# Altium PCB PCB1.PcbDoc (part 2 of 4)
Units mil, origin at the board's own origin, x right, y up, seen from the top; angles counter-clockwise.
Board outline 1968.5 x 2362.2 mil, 4 copper layers (Top Layer, GND, VCC, Bottom Layer), stack 30.634 mil thick; 134 components, 248 nets, 1063 pads, 710 vias.
Unrouted connection lines stored in the file: 163.
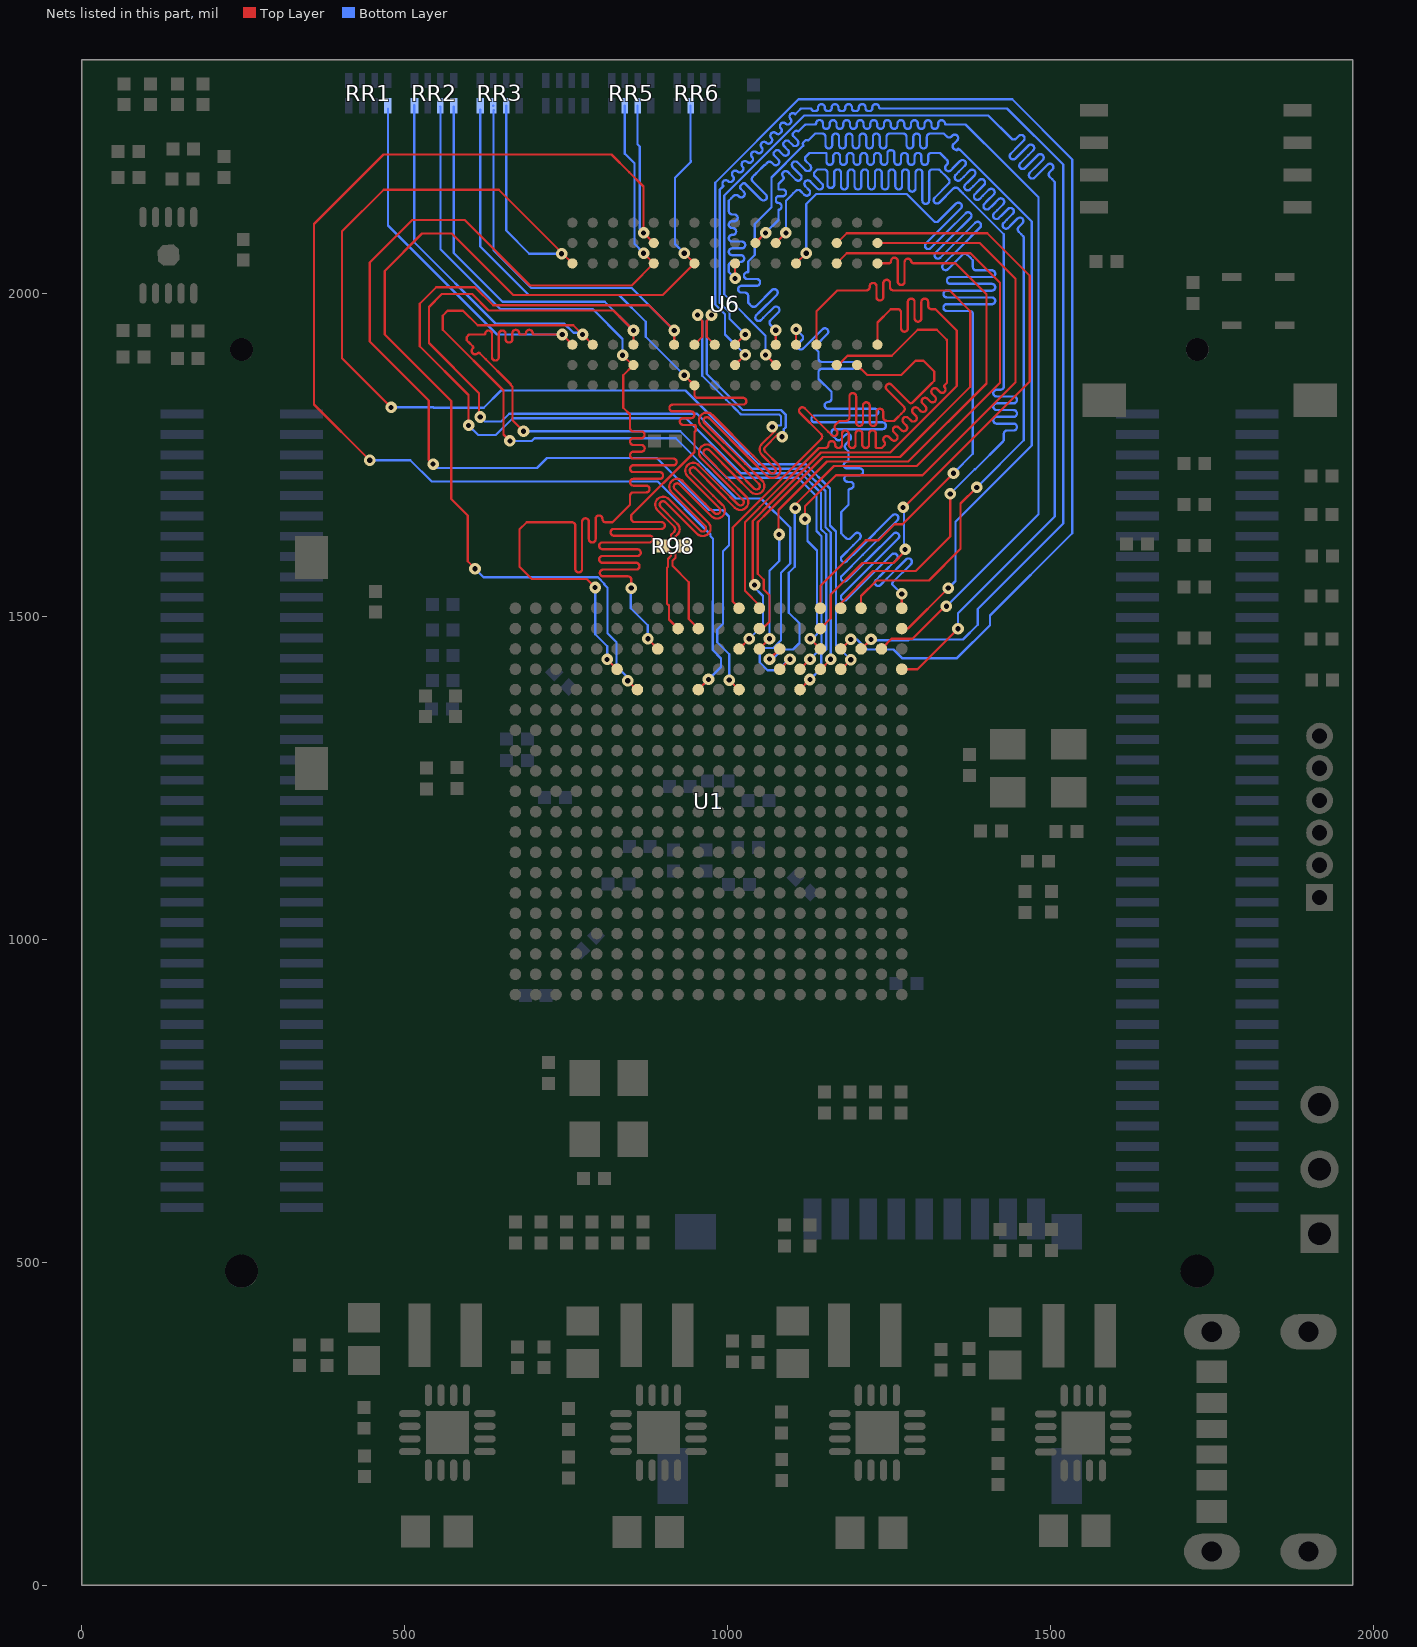
[diagram p4: the nets of this part, all layers, seen from the top]

## Via types
v1: diameter 18, hole 8, Top Layer to Bottom Layer, tented both sides, 708 vias
v2: diameter 40, hole 20, Top Layer to Bottom Layer, tented both sides, 2 vias

## Nets (pads, with @x,y where several pads share a name; then routed paths per layer and width w, separated by ;. In a path a pad name is that pad's centre, name@x,y a point inside that pad or via, vN(x,y) a via of type N, cw(c..) or ccw(c..) an arc to the next point about the centre after c; other vN are vias at no path point) (continued)
ADDR3-A10: RR3.7 U1.F5 U6.L7 | length 2159.5
  Top Layer w3.5: v1(599,1796) 599,1843 523.5,1918.5 523.5,1984.5 549,2010 609,2010 637,1982 878.55,1982 v1(917.45,1943.1) U6.L7@917.45,1920.83 ; U1.F5@1111.85,1386.65 v1(1127.6,1402.4)
  Bottom Layer w3.5: v1(599,1796) 614,1781 641,1781 667.25,1807.25 935.75,1807.25 1021,1722 1114.1,1722 1144.75,1691.35 1144.75,1635.3 1152.75,1627.3 1152.75,1448.85 1145,1441.1 1145,1419.8 v1(1127.6,1402.4) ; v1@599,1796.75 v1@599.38,1796.38 ; RR3.7@637,2291 RR3.7@637.44,2290.56 ; RR3.7@638,2284 637.44,2283.44 637.44,2067.56 696,2009 851.55,2009 v1(917.45,1943.1)
ADDR3-A11: RR2.8 U1.G4 U6.R7 | length 1837.1
  Top Layer w3.5: v1(663,1772) 653,1782 653,1850 559,1944 559,1966 566.5,1973.5 590.5,1973.5 612.99,1951.01 761.28,1951.01 v1(775.53,1936.76) U6.R7@791.28,1921.01 ; U1.G4@1081,1418 v1(1096.75,1433.75)
  Bottom Layer w3.5: RR2.8@515,2292 515,2079.6 640.6,1954 746.94,1954 761.41,1939.53 772.75,1939.53 v1(775.53,1936.76) ; v1(663,1772) 697,1772 701,1776 920,1776 1013,1683 1052,1683 1097,1638 1097,1582 1082.95,1567.95 1082.95,1463.3 1071,1451.35 1056.35,1451.35 1050,1445 1050,1429.05 1062.05,1417 1078,1417 1094.75,1433.75 v1(1096.75,1433.75)
ADDR3-A12: RR2.5 U1.E4 U6.N7 | length 2007.9
  Top Layer w3.5: v1(617,1809) 615,1811 615,1846 537.5,1923.5 537.5,1979.5 557.5,1999.5 604.5,1999.5 630,1974 823.56,1974 v1(854.46,1943.1) U6.N7@854.46,1920.83 ; U1.E4@1144,1418 v1(1159.75,1433.75)
  Bottom Layer w3.5: RR2.5@576,2290 576,2063.15 651.65,1987.5 810.06,1987.5 v1(854.46,1943.1) ; v1(617,1809) 624,1802 649.75,1802 662,1814.25 952.75,1814.25 1038,1729 1117,1729 1151.75,1694.25 1151.75,1638.2 1159.75,1630.2 v1(1159.75,1433.75)
ADDR3-A13: RR3.6 U1.D4 U6.T3 | length 2085.7
  Top Layer w3.5: v1(479,1824) 403,1900 403,2096.6 467.4,2161 645.77,2161 v1@744.77,2062 ; v1(743,2062) v1@744.77,2062 ; U6.T3@759.78,2046.99 v1@744.77,2062 ; U1.D4@1175.05,1417.35 v1(1190.8,1433.1)
  Bottom Layer w3.5: v1(479,1824) 544.25,1824 545,1823.25 622.49,1823.25 649.23,1849.99 849.84,1849.99 850.1,1850.25 891.41,1850.25 891.67,1849.99 935.01,1849.99 1018.75,1766.25 1018.75,1765.51 1048.26,1736 1121,1736 1158.75,1698.25 1158.75,1641.1 1168,1631.85 1168,1455.9 v1(1190.8,1433.1) ; RR3.6@657.13,2291 657.13,2097.87 693,2062 v1(743,2062)
ADDR3-A14: RR1.5 U1.F4 U6.T7 | length 1795
  Top Layer w3.5: 624.75,1937.78 cw(c630,1937.78) 630,1943.03 cw(c630,1937.78) 635.25,1937.78 635.25,1936.76 635.25,1901.8 ccw(c640.5,1901.8) 640.5,1896.55 ccw(c640.5,1901.8) 645.75,1901.8 645.75,1936.76 645.75,1937.78 cw(c651,1937.78) 651,1943.03 cw(c651,1937.78) 656.25,1937.78 656.25,1936.76 656.25,1929.64 ccw(c661.5,1929.64) 661.5,1924.39 ccw(c661.5,1929.64) 666.75,1929.64 666.75,1936.76 666.75,1938.76 cw(c672,1938.76) 672,1944.01 cw(c672,1938.76) 677.25,1938.76 ccw(c679.25,1938.76) 679.25,1936.76 685.75,1936.76 ccw(c685.75,1938.76) 687.75,1938.76 cw(c693,1938.76) 693,1944.01 cw(c693,1938.76) 698.25,1938.76 ccw(c700.25,1938.76) 700.25,1936.76 708.75,1936.76 714,1936.76 v1(744.03,1936.76) U6.T7@759.78,1921.01 ; 624.75,1938.76 cw(c622.75,1938.76) 622.75,1936.76 599.76,1936.76 596,1933 596,1928 599.71,1924.29 605.3,1918.7 cw(c603.46,1916.86) 605.3,1915.02 ccw(c609.01,1911.31) 605.3,1907.6 ccw(c609.01,1911.31) 612.72,1907.6 cw(c614.56,1905.76) 616.4,1907.6 625.5,1898.5 660,1864 664.5,1859.5 ; 664,1859 667,1856 667,1804 v1(684,1787) ; U1.F4@1112,1418 v1(1127.75,1433.75)
  Bottom Layer w3.5: RR1.5@474,2287 474,2105.75 643,1936.76 v1(744.03,1936.76) ; v1(684,1787) 927,1787 999,1715 1109,1715 1137.75,1686.25 1137.75,1632.4 1145.75,1624.4 1145.75,1451.75 v1(1127.75,1433.75)
ADDR3-BA0: RR5.6 U1.L5 U6.M2 | length 2107.5
  Top Layer w3.5: v1(446,1742) 359.5,1828.5 359.5,2107.8 467.2,2215.5 482.3,2215.5 820.5,2215.5 847.74,2188.26 867.54,2168.46 870.01,2165.99 v1(870.01,2094.24) U6.M2@885.76,2078.49 ; U1.L5@954.85,1386.85 v1(970.6,1402.6)
  Bottom Layer w3.5: v1@446,1742.25 508.75,1742.25 542,1709 892,1709 973.75,1627.25 973.75,1624.51 977.7,1620.56 977.7,1524.87 977,1524.17 977,1448 990,1435 990,1421.8 v1@972.2,1404 ; RR5.6@860.73,2291 860.73,2231.27 864,2228 864,2100.25 v1(870.01,2094.24)
ADDR3-BA1: RR2.6 U1.R4 U6.N8 | length 1933.5
  Top Layer w3.5: v1(795,1545) 782,1558 697,1558 678,1577 678,1635 689,1646 759,1646 cw(c759,1640.75) 764.25,1640.75 764.25,1573.57 ccw(c769.5,1573.57) 769.5,1568.32 ccw(c769.5,1573.57) 774.75,1573.57 774.75,1646 774.75,1646.9 cw(c780,1646.9) 780,1652.15 cw(c780,1646.9) 785.25,1646.9 785.25,1646 785.25,1619.93 ccw(c790.5,1619.93) 790.5,1614.68 ccw(c790.5,1619.93) 795.75,1619.93 795.75,1646 795.75,1651.25 cw(c801,1651.25) 801,1656.5 cw(c801,1651.25) 806.25,1651.25 ccw(c811.5,1651.25) 811.5,1646 816.75,1646 822,1646 841,1665 845.29,1669.29 849,1673 849,1681.75 849,1687 cw(c854.25,1687) 854.25,1692.25 873.93,1692.25 ccw(c873.93,1697.5) 879.18,1697.5 ccw(c873.93,1697.5) 873.93,1702.75 854.25,1702.75 cw(c854.25,1708) 849,1708 cw(c854.25,1708) 854.25,1713.25 894.93,1713.25 ccw(c894.93,1718.5) 900.18,1718.5 ccw(c894.93,1718.5) 894.93,1723.75 854.25,1723.75 cw(c854.25,1729) 849,1729 cw(c854.25,1729) 854.25,1734.25 915.93,1734.25 ccw(c915.93,1739.5) 921.18,1739.5 ccw(c915.93,1739.5) 915.93,1744.75 854.25,1744.75 cw(c854.25,1750) 849,1750 cw(c854.25,1750) 854.25,1755.25 866.42,1755.25 ccw(c866.42,1760.5) 871.67,1760.5 ccw(c866.42,1760.5) 866.42,1765.75 854.25,1765.75 cw(c854.25,1771) 849,1771 cw(c854.25,1771) 854.25,1776.25 866.32,1776.25 ccw(c866.32,1781.5) 871.57,1781.5 ccw(c866.32,1781.5) 866.32,1786.75 854.25,1786.75 cw(c854.25,1792) 849,1792 849,1797.25 849,1807.75 849,1813 838.52,1823.48 838.52,1828 838.52,1873.76 U6.N8@854.27,1889.51 ; v1(813.6,1433.6) U1.R4@829.35,1417.85 ; v1(837.52,1904.76) U6.N8@853.27,1889.01
  Bottom Layer w3.5: RR2.6@555,2290 555.33,2289.67 555.33,2068.97 648.3,1976 791.52,1976 837.52,1930 v1(837.52,1904.76) ; v1(795,1545) 795,1472.45 813.6,1453.85 v1(813.6,1433.6)
ADDR3-BA2: RR5.7 U1.J5 U6.M3 | length 1933.9
  Top Layer w3.5: v1(544,1736) 537.25,1742.75 537.25,1834.75 446,1926 446,2048.21 511.79,2114 593,2114 694.13,2012.87 851.64,2012.87 U6.M3@885.76,2046.99 v1(870.01,2062.74) ; v1(1002.6,1401.6) U1.J5@1018.35,1385.85
  Bottom Layer w3.5: v1(544,1736) 550,1730 705,1730 720.5,1745.5 890.24,1745.5 970.87,1664.87 992.23,1664.87 1002.25,1654.85 1002.25,1610.25 993,1601 993,1489 984,1480 984,1460 1002.6,1441.4 v1(1002.6,1401.6) ; RR5.7@841.04,2291 841.04,2216.96 855.76,2202.24 855.76,2077.24 870.01,2062.99 v1(870.01,2062.74)
ADDR3-CAS: RR6.7 U1.P5 U6.K3 | length 1747.7
  Top Layer w3.5: v1(609,1574) 597.5,1585.5 597.5,1656.5 572,1682 572,1834 469,1937 469,2035.21 526.9,2093.1 572.9,2093.1 668,1998 899.76,1998 U6.K3@948.76,2046.99 v1(933.01,2062.74) ; v1(845.6,1400.6) U1.P5@861.35,1384.85
  Bottom Layer w3.5: v1(609,1574) 622.25,1560.75 799.4,1560.75 809.25,1550.91 809.25,1549.49 814,1544.74 814,1474 828,1460 828,1423 845.6,1405.4 v1(845.6,1400.6) ; v1(933.01,2062.74) 918.76,2076.99 918.76,2179.76 943,2204 943,2206 ; 942.84,2204.84 RR6.7@942.84,2291
ADDR3-CKE0: RR3.8 U1.N3 U6.K9 | length 1924.3
  Top Layer w3.5: v1(851,1544) 851,1557 ccw(c845.75,1557) 845.75,1562.25 807.48,1562.25 cw(c807.48,1567.5) 802.23,1567.5 cw(c807.48,1567.5) 807.48,1572.75 851,1572.75 858.46,1572.75 ccw(c858.46,1578) 863.71,1578 ccw(c858.46,1578) 858.46,1583.25 851,1583.25 806.49,1583.25 cw(c806.49,1588.5) 801.24,1588.5 cw(c806.49,1588.5) 806.49,1593.75 851,1593.75 860.39,1593.75 ccw(c860.39,1599) 865.64,1599 ccw(c860.39,1599) 860.39,1604.25 851,1604.25 806.49,1604.25 cw(c806.49,1609.5) 801.24,1609.5 cw(c806.49,1609.5) 806.49,1614.75 851,1614.75 879.25,1614.75 ccw(c879.25,1620) 884.5,1620 ccw(c879.25,1620) 879.25,1625.25 851,1625.25 824.06,1625.25 cw(c824.06,1630.5) 818.81,1630.5 cw(c824.06,1630.5) 824.06,1635.75 851,1635.75 897.72,1635.75 ccw(c897.72,1641) 902.97,1641 ccw(c897.72,1641) 897.72,1646.25 856.25,1646.25 cw(c856.25,1651.5) 851,1651.5 851,1657.24 948.76,1755 948.76,1777 948.76,1786.25 ccw(c948.76,1788.14) 950.64,1788.14 950.64,1794.86 ccw(c948.76,1794.86) 948.76,1796.75 931.39,1796.75 cw(c931.39,1802) 926.14,1802 cw(c931.39,1802) 931.39,1807.25 943.51,1807.25 ccw(c943.51,1812.5) 948.76,1812.5 ccw(c943.51,1812.5) 943.51,1817.75 915.32,1817.75 cw(c915.32,1823) 910.07,1823 cw(c915.32,1823) 915.32,1828.25 948.76,1828.25 1023.87,1828.25 ccw(c1023.87,1833.5) 1029.12,1833.5 ccw(c1023.87,1833.5) 1023.87,1838.75 954.01,1838.75 cw(c954.01,1844) 948.76,1844 U6.K9@948.76,1858.02 v1(933.01,1873.77) ; v1(876.6,1465.6) U1.N3@892.35,1449.85
  Bottom Layer w3.5: RR3.8@617,2285 617,2073 692,1998 832,1998 873.44,1956.56 873.44,1933.33 v1(933.01,1873.77) ; v1(851,1544) 850,1543 850,1513 876.6,1486.4 v1(876.6,1465.6)
ADDR3-CLK0_N: R98.2 U1.M2 U6.K7 | length 1708.2
  Top Layer w3.5: 917.36,1638.92 891.59,1664.7 cw(c900.25,1673.36) 891.59,1682.02 cw(c900.25,1673.36) 908.91,1682.02 957.82,1633.12 ccw(c961.53,1636.83) 965.24,1633.12 ccw(c961.53,1636.83) 966.78,1636.83 ccw(c961.53,1636.83) 965.24,1640.54 913.38,1692.4 cw(c922.04,1701.06) 913.38,1709.73 cw(c922.04,1701.06) 930.7,1709.73 965.62,1674.81 979.99,1660.44 ccw(c983.71,1664.15) 987.4,1660.42 ; 917.38,1638.91 cw(c913.65,1635.21) 918.9,1635.21 cw(c913.65,1635.21) 917.36,1631.5 912.62,1626.76 912.62,1619.34 910.57,1617.29 908.27,1617.29 R98.2@899.98,1609 908.27,1600.71 910.57,1600.71 912.62,1598.66 912.62,1594.14 907.66,1589.18 907.66,1577.06 906.2,1575.6 906.2,1520 909.2,1517 909.2,1495.6 U1.M2@923.45,1481.35 ; U6.K7@948.76,1921.01 961,1933.26 961,1957.7 953.75,1964.95 v1(953.75,1967) ; 987.42,1660.44 ccw(c983.71,1664.15) 988.96,1664.15 ccw(c983.71,1664.15) 987.42,1667.86 973.05,1682.23 938.13,1717.15 cw(c946.79,1725.81) 938.13,1734.47 cw(c946.79,1725.81) 955.45,1734.47 990.37,1699.56 1016.35,1673.57 ccw(c1020.07,1677.29) 1023.78,1673.57 ccw(c1020.06,1677.29) 1025.32,1677.29 ccw(c1020.06,1677.29) 1023.78,1681 997.79,1706.98 959.32,1745.45 cw(c967.98,1754.12) 959.32,1762.78 cw(c967.98,1754.12) 976.65,1762.78 1015.12,1724.31 1041.1,1698.32 ccw(c1044.81,1702.04) 1048.53,1698.32 ccw(c1044.81,1702.04) 1050.06,1702.04 ccw(c1044.81,1702.04) 1048.53,1705.75 1022.54,1731.73 959.34,1794.93 cw(c968,1803.59) 959.34,1812.26 cw(c968,1803.59) 976.67,1812.26 1039.86,1749.06 1065.85,1723.07 ccw(c1069.56,1726.78) 1073.26,1723.06 ccw(c1069.56,1726.78) 1074.81,1726.78 ccw(c1069.56,1726.78) 1073.27,1730.5 1053.48,1750.29 cw(c1062.14,1758.95) 1053.48,1767.62 1072.98,1787.12 1069.31,1790.8 v1(1069.31,1793.69)
  Bottom Layer w3.5: v1(953.75,1967) 953.75,1964.95 961,1957.7 961,1872.81 997.91,1835.91 1004.41,1829.41 1013.74,1820.07 1015.76,1818.05 1015.85,1818.05 1020.85,1813.05 1080.05,1813.05 1083,1810.1 1083,1795.75 1071.36,1795.75 v1(1069.31,1793.69)
ADDR3-CLK0_P: R98.1 U1.L2 U6.J7 | length 1716.3
  Top Layer w3.5: 943.06,1729.51 ccw(c946.79,1725.81) 943.08,1722.1 977.99,1687.19 992.37,1672.81 cw(c983.71,1664.15) 995.96,1664.15 cw(c983.71,1664.15) 992.37,1655.49 cw(c983.71,1664.15) 975.04,1655.49 960.67,1669.86 925.75,1704.78 ccw(c922.04,1701.06) 918.33,1704.78 ccw(c922.04,1701.06) 918.33,1697.35 970.19,1645.5 cw(c961.53,1636.83) 973.78,1636.83 cw(c961.53,1636.83) 970.19,1628.17 cw(c961.53,1636.83) 952.87,1628.17 903.96,1677.07 ccw(c900.25,1673.36) 896.54,1677.07 ccw(c900.25,1673.36) 896.54,1669.65 922.31,1643.87 cw(c913.65,1635.21) 925.9,1635.21 cw(c913.65,1635.21) 922.31,1626.55 919.62,1623.86 919.62,1619.34 921.67,1617.29 923.98,1617.29 R98.1@932.27,1609 923.98,1600.71 921.67,1600.71 919.62,1598.66 919.62,1591.24 914.66,1586.28 914.66,1578.49 940,1553.15 940,1496.2 U1.L2@954.85,1481.35 ; 943.08,1729.53 cw(c946.79,1725.81) 950.5,1729.53 985.42,1694.61 1011.4,1668.62 ccw(c1020.07,1677.29) 1028.73,1668.62 ccw(c1020.06,1677.29) 1032.31,1677.29 ccw(c1020.06,1677.29) 1028.73,1685.95 1002.74,1711.93 964.27,1750.4 cw(c967.98,1754.12) 964.26,1757.81 ; 964.27,1757.83 cw(c967.98,1754.12) 971.7,1757.83 1010.17,1719.36 1036.15,1693.37 ccw(c1044.81,1702.04) 1053.48,1693.37 ccw(c1044.81,1702.04) 1057.06,1702.04 ccw(c1044.81,1702.04) 1053.48,1710.7 1027.49,1736.68 964.29,1799.88 cw(c968,1803.59) 964.29,1807.31 cw(c968,1803.59) 971.72,1807.31 1034.91,1744.11 1060.9,1718.12 ccw(c1069.56,1726.78) 1078.22,1718.12 ccw(c1069.56,1726.78) 1081.81,1726.78 ccw(c1069.56,1726.78) 1078.22,1735.45 1058.43,1755.24 cw(c1062.14,1758.95) 1058.43,1762.67 1077.93,1782.17 1081.61,1778.49 v1(1084.51,1778.49) ; v1(975.25,1967) 975.25,1964.95 968,1957.7 968,1933.26 U6.J7@980.25,1921.01
  Bottom Layer w3.5: v1(975.25,1967) 975.25,1964.95 968,1957.7 968,1875.71 1002.86,1840.86 1009.36,1834.36 1018.66,1825.05 1018.75,1825.05 1023.75,1820.05 1082.95,1820.05 1090,1813 1090,1792.85 1087.28,1790.13 1087.28,1781.27 v1(1084.51,1778.49)
ADDR3-D0: U1.C3 U6.H7 | length 1999.2
  Top Layer w3.5: U6.H7@1011.75,1921.01 v1(1027.5,1936.76) ; U1.C3@1206.55,1448.85 v1(1222.3,1464.6)
  Bottom Layer w3.5: v1(1027.5,1936.76) 1003,1961.26 1003,1971.1 988,1986.1 988,2161 990,2163 993.71,2166.71 993.63,2166.8 cw(c997.34,2170.51) 993.63,2174.22 cw(c997.34,2170.51) 1001.05,2174.22 1001.14,2174.14 ccw(c1004.18,2177.18) 1007.22,2174.14 1008.56,2175.48 ccw(c1005.52,2178.52) 1008.56,2181.56 1008.48,2181.65 cw(c1012.19,2185.36) 1008.48,2189.07 cw(c1012.19,2185.36) 1015.9,2189.07 1015.99,2188.99 ccw(c1019.03,2192.03) 1022.06,2188.99 1023.41,2190.33 ccw(c1020.37,2193.37) 1023.41,2196.41 1023.33,2196.49 cw(c1027.04,2200.21) 1023.33,2203.92 cw(c1027.04,2200.21) 1030.75,2203.92 1030.84,2203.84 ccw(c1033.87,2206.87) 1036.91,2203.84 1038.26,2205.18 ccw(c1035.22,2208.22) 1038.26,2211.26 1038.18,2211.34 cw(c1041.89,2215.06) 1038.18,2218.77 cw(c1041.89,2215.06) 1045.6,2218.77 1045.68,2218.68 ccw(c1048.72,2221.72) 1051.76,2218.68 1053.11,2220.03 ccw(c1050.07,2223.07) 1053.11,2226.11 1053.03,2226.19 cw(c1056.74,2229.91) 1053.03,2233.62 cw(c1056.74,2229.91) 1060.45,2233.62 1060.53,2233.53 ccw(c1063.57,2236.57) 1066.61,2233.53 1067.96,2234.88 ccw(c1064.92,2237.92) 1067.96,2240.96 1067.87,2241.04 cw(c1071.59,2244.75) 1067.87,2248.47 cw(c1071.59,2244.75) 1075.3,2248.47 1075.38,2248.38 ccw(c1078.42,2251.42) 1081.46,2248.38 1082.81,2249.73 ccw(c1079.77,2252.77) 1082.81,2255.81 1082.72,2255.89 cw(c1086.44,2259.6) 1082.72,2263.32 cw(c1086.44,2259.6) 1090.15,2263.32 1090.23,2263.23 ccw(c1093.27,2266.27) 1096.31,2263.23 1097.66,2264.58 ccw(c1094.62,2267.62) 1097.66,2270.66 1097.57,2270.74 cw(c1101.29,2274.45) 1097.57,2278.17 cw(c1101.29,2274.45) 1105,2278.17 1105.08,2278.08 1112.51,2285.51 1114,2287 1119.25,2287 1129.75,2287 ccw(c1133.75,2287) 1133.75,2283 1136.25,2283 ccw(c1136.25,2287) 1140.25,2287 1140.25,2288.39 cw(c1145.5,2288.39) 1145.5,2293.64 cw(c1145.5,2288.39) 1150.75,2288.39 1150.75,2287 ccw(c1154.75,2287) 1154.75,2283 1157.25,2283 ccw(c1157.25,2287) 1161.25,2287 1161.25,2288.39 cw(c1166.5,2288.39) 1166.5,2293.64 cw(c1166.5,2288.39) 1171.75,2288.39 1171.75,2287 ccw(c1175.75,2287) 1175.75,2283 1178.25,2283 ccw(c1178.25,2287) 1182.25,2287 1182.25,2288.39 cw(c1187.5,2288.39) 1187.5,2293.64 cw(c1187.5,2288.39) 1192.75,2288.39 1192.75,2287 ccw(c1196.75,2287) 1196.75,2283 1199.25,2283 ccw(c1199.25,2287) 1203.25,2287 1203.25,2288.39 cw(c1208.5,2288.39) 1208.5,2293.64 cw(c1208.5,2288.39) 1213.75,2288.39 1213.75,2287 ccw(c1217.75,2287) 1217.75,2283 1220.25,2283 ccw(c1220.25,2287) 1224.25,2287 1224.25,2288.39 cw(c1229.5,2288.39) 1229.5,2293.64 cw(c1229.5,2288.39) 1234.75,2288.39 ; v1(1222.3,1464.6) 1223.65,1463.25 1280,1463.25 1281.35,1464.6 1364.75,1464.6 1387.58,1487.42 1387.58,1511.58 1520,1644 1520,2200 1433,2287 1241,2287 1236.5,2287 cw(c1236.5,2288.75) 1234.75,2288.75
ADDR3-D1: U1.B3 U6.H3 | length 1998.6
  Top Layer w3.5: v1(1011.75,2023.75) U6.H3@1011.75,2046.99 ; U1.B3@1238.35,1449.85 1254.1,1465.6 1286.6,1465.6 1337,1516 v1(1339,1516)
  Bottom Layer w3.5: v1(1011.75,2023.75) 1002,2033.5 1002,2038.75 1002,2044 cw(c1007.25,2044) 1007.25,2049.25 1020.61,2049.25 ccw(c1020.61,2054.5) 1025.86,2054.5 ccw(c1020.61,2054.5) 1020.61,2059.75 1007.25,2059.75 cw(c1007.25,2065) 1002,2065 cw(c1007.25,2065) 1007.25,2070.25 1022.12,2070.25 ccw(c1022.12,2075.5) 1027.37,2075.5 ccw(c1022.12,2075.5) 1022.12,2080.75 1007.25,2080.75 cw(c1007.25,2086) 1002,2086 cw(c1007.25,2086) 1007.25,2091.25 1008.13,2091.25 ccw(c1008.13,2096.5) 1013.38,2096.5 ccw(c1008.13,2096.5) 1008.13,2101.75 1007.25,2101.75 cw(c1007.25,2107) 1002,2107 cw(c1007.25,2107) 1007.25,2112.25 1010.41,2112.25 ccw(c1010.41,2117.5) 1015.66,2117.5 ccw(c1010.41,2117.5) 1010.41,2122.75 1007.25,2122.75 cw(c1007.25,2128) 1002,2128 1002,2133.25 1002,2143.75 1002,2144 1005.71,2147.71 1009.42,2151.42 cw(c1013.14,2147.71) 1016.85,2151.42 1017.63,2150.64 ccw(c1021.34,2154.36) 1025.05,2150.64 ccw(c1021.34,2154.36) 1025.05,2158.07 1020.56,2162.56 cw(c1023.13,2165.13) 1020.56,2167.69 1022.86,2169.99 cw(c1025.42,2167.42) 1027.99,2169.99 1052.04,2145.93 ccw(c1055.75,2149.65) 1059.46,2145.93 ccw(c1055.75,2149.65) 1059.46,2153.36 1039.12,2173.7 cw(c1042.84,2177.41) 1039.12,2181.12 1042.5,2184.5 1044.5,2186.5 1057.47,2199.47 1058,2199.47 1060.77,2202.23 1061.37,2202.84 cw(c1065.08,2199.12) 1068.79,2202.84 1071.15,2200.48 ccw(c1074.87,2204.19) 1078.58,2200.48 ccw(c1074.87,2204.19) 1078.58,2207.9 1072.51,2213.97 cw(c1075.34,2216.8) 1072.51,2219.63 1074.27,2221.4 cw(c1077.1,2218.57) 1079.93,2221.4 1086,2215.33 ccw(c1089.72,2219.04) 1093.43,2215.33 ccw(c1089.72,2219.04) 1093.43,2222.75 1087.36,2228.82 cw(c1090.18,2231.65) 1087.36,2234.48 1089.12,2236.25 cw(c1091.95,2233.42) 1094.78,2236.25 1100.85,2230.18 ccw(c1104.56,2233.89) 1108.28,2230.18 ccw(c1104.56,2233.89) 1108.28,2237.6 1102.2,2243.67 cw(c1105.03,2246.5) 1102.2,2249.33 1103.97,2251.1 cw(c1106.8,2248.27) 1109.63,2251.1 1117.05,2258.52 1120.77,2262.23 1121,2262.23 1132,2262.23 1135.73,2262.23 ccw(c1135.73,2263.75) 1137.25,2263.75 cw(c1142.5,2263.75) 1142.5,2269 cw(c1142.5,2263.75) 1147.75,2263.75 1147.75,2262.23 1147.75,2260.52 ccw(c1153,2260.52) 1153,2255.27 ccw(c1153,2260.52) 1158.25,2260.52 1158.25,2262.23 1158.25,2263.48 cw(c1163.5,2263.48) 1163.5,2268.73 cw(c1163.5,2263.48) 1168.75,2263.48 1168.75,2262.23 1168.75,2260.52 ccw(c1174,2260.52) 1174,2255.27 ccw(c1174,2260.52) 1179.25,2260.52 1179.25,2262.23 1179.25,2263.48 cw(c1184.5,2263.48) 1184.5,2268.73 cw(c1184.5,2263.48) 1189.75,2263.48 1189.75,2262.23 1189.75,2260.52 ccw(c1195,2260.52) 1195,2255.27 ccw(c1195,2260.52) 1200.25,2260.52 1200.25,2262.23 1200.25,2263.48 cw(c1205.5,2263.48) 1205.5,2268.73 cw(c1205.5,2263.48) 1210.75,2263.48 1210.75,2262.23 1210.75,2260.52 ccw(c1216,2260.52) 1216,2255.27 ccw(c1216,2260.52) 1221.25,2260.52 1221.25,2262.23 1221.25,2263.48 cw(c1226.5,2263.48) 1226.5,2268.73 cw(c1226.5,2263.48) 1231.75,2263.48 1231.75,2262.23 1231.75,2260.52 ccw(c1237,2260.52) 1237,2255.27 ccw(c1237,2260.52) 1242.25,2260.52 1242.25,2262.23 1242.25,2263.48 cw(c1247.5,2263.48) 1247.5,2268.73 cw(c1247.5,2263.48) 1252.75,2263.48 1252.75,2262.23 1252.75,2260.52 ccw(c1258,2260.52) 1258,2255.27 ccw(c1258,2260.52) 1263.25,2260.52 1263.25,2262.23 1263.25,2263.48 cw(c1268.5,2263.48) 1268.5,2268.73 cw(c1268.5,2263.48) 1273.75,2263.48 1273.75,2262.23 1273.75,2260.52 ccw(c1279,2260.52) 1279,2255.27 ccw(c1279,2260.52) 1284.25,2260.52 1284.25,2262.23 1284.25,2263.48 cw(c1289.5,2263.48) 1289.5,2268.73 cw(c1289.5,2263.48) 1294.75,2263.48 1294.75,2262.23 1294.75,2260.52 ccw(c1300,2260.52) 1300,2255.27 ccw(c1300,2260.52) 1305.25,2260.52 1305.25,2262.23 1305.25,2263.48 cw(c1310.5,2263.48) 1310.5,2268.73 cw(c1310.5,2263.48) 1315.75,2263.48 1315.75,2262.23 1315.75,2260.52 ccw(c1321,2260.52) 1321,2255.27 ccw(c1321,2260.52) 1326.25,2260.52 1326.25,2262.23 1326.25,2263.48 cw(c1331.5,2263.48) 1331.5,2268.73 cw(c1331.5,2263.48) 1336.75,2263.48 1336.75,2263.74 ccw(c1338.27,2263.75) 1338.27,2262.23 1341,2262.23 1368.77,2262.23 1429,2202 1481.5,2149.5 1481.5,1658.5 v1(1339,1516)
ADDR3-D2: U1.A2 U6.F7 | length 2003.7
  Top Layer w3.5: U6.F7@1074.74,1921.01 v1(1074.74,1943.28) ; U1.A2@1269.85,1481.35 1279.35,1481.35 v1(1342,1544)
  Bottom Layer w3.5: v1(1074.74,1943.28) 1074.01,1944.01 1070.3,1947.72 1066.59,1951.44 cw(c1070.3,1955.15) 1066.59,1958.86 1078.86,1971.14 ccw(c1075.15,1974.85) 1078.86,1978.56 ccw(c1075.15,1974.85) 1071.44,1978.56 1055.45,1962.57 1052.1,1959.22 cw(c1048.39,1962.93) 1044.67,1959.22 cw(c1048.39,1962.93) 1044.67,1966.65 1048.02,1970 1076.19,1998.17 ccw(c1072.48,2001.88) 1076.19,2005.59 ccw(c1072.48,2001.88) 1068.77,2005.59 1044.31,1981.13 cw(c1040.6,1984.85) 1036.89,1981.13 1033.18,1984.85 1032,1986.02 1032,1991.27 1032,1996.52 ccw(c1026.75,1996.52) 1026.75,2001.77 1021.77,2001.77 cw(c1021.77,2007.02) 1016.52,2007.02 cw(c1021.77,2007.02) 1021.77,2012.27 1032,2012.27 1045.14,2012.27 ccw(c1045.14,2017.52) 1050.39,2017.52 ccw(c1045.14,2017.52) 1045.14,2022.77 1032,2022.77 1030.77,2022.77 cw(c1030.77,2028.02) 1025.52,2028.02 cw(c1030.77,2028.02) 1030.77,2033.27 ccw(c1030.77,2034.5) 1032,2034.5 1032,2043.77 1032,2050 1042,2060 1042,2065.25 1042,2075.75 1042,2078 1042,2108 1068,2134 1068,2180 1114,2226 1117.71,2229.71 cw(c1120.12,2232.12) 1117.71,2234.53 1120.31,2237.14 cw(c1122.73,2234.73) 1125.14,2237.14 1132.56,2244.56 1136,2248 1141.25,2248 1146.5,2248 cw(c1146.5,2242.75) 1151.75,2242.75 1151.75,2230.25 ccw(c1157,2230.25) 1157,2225 ccw(c1157,2230.25) 1162.25,2230.25 1162.25,2242.75 cw(c1167.5,2242.75) 1167.5,2248 cw(c1167.5,2242.75) 1172.75,2242.75 1172.75,2230.25 ccw(c1178,2230.25) 1178,2225 ccw(c1178,2230.25) 1183.25,2230.25 1183.25,2242.75 cw(c1188.5,2242.75) 1188.5,2248 cw(c1188.5,2242.75) 1193.75,2242.75 1193.75,2230.25 ccw(c1199,2230.25) 1199,2225 ccw(c1199,2230.25) 1204.25,2230.25 1204.25,2242.75 cw(c1209.5,2242.75) 1209.5,2248 cw(c1209.5,2242.75) 1214.75,2242.75 1214.75,2230.25 ccw(c1220,2230.25) 1220,2225 ccw(c1220,2230.25) 1225.25,2230.25 1225.25,2242.75 cw(c1230.5,2242.75) 1230.5,2248 cw(c1230.5,2242.75) 1235.75,2242.75 1235.75,2230.25 ccw(c1241,2230.25) 1241,2225 ccw(c1241,2230.25) 1246.25,2230.25 1246.25,2242.75 cw(c1251.5,2242.75) 1251.5,2248 1256.75,2248 1267,2248 1269,2248 1272,2248 cw(c1272,2242.75) 1277.25,2242.75 1277.25,2230.25 ccw(c1282.5,2230.25) 1282.5,2225 ccw(c1282.5,2230.25) 1287.75,2230.25 1287.75,2242.75 cw(c1293,2242.75) 1293,2248 cw(c1293,2242.75) 1298.25,2242.75 1298.25,2230.25 ccw(c1303.5,2230.25) 1303.5,2225 ccw(c1303.5,2230.25) 1308.75,2230.25 1308.75,2242.75 cw(c1314,2242.75) 1314,2248 1319.25,2248 1329.75,2248 1335,2248 1339.5,2243.5 ccw(c1343.21,2247.21) 1346.92,2243.5 1348.22,2244.8 cw(c1351.93,2241.08) 1355.65,2244.8 cw(c1351.93,2241.08) 1355.65,2237.37 1350.64,2232.36 1350.2,2231.93 ccw(c1353.91,2228.21) 1350.2,2224.5 ccw(c1353.91,2228.21) 1357.62,2224.5 ; v1(1342,1544) 1353,1555 1353,1646.85 1471,1764.85 1471,2112 1361,2222 ccw(c1358.06,2219.06) 1355.12,2222 ; 1355.26,2222.14 1357.48,2224.36
ADDR3-D3: U1.A4 U6.F8 | length 1997.7
  Top Layer w3.5: v1(1058.99,1905.26) U6.F8@1074.74,1889.51 ; U1.A4@1269.85,1418.35 1294.35,1418.35 v1(1357,1481)
  Bottom Layer w3.5: v1(1058.99,1905.26) 1058.99,1935.01 995,1999 995,2152.02 1118.98,2276 1404,2276 1439.68,2240.32 ccw(c1443.39,2244.03) 1447.1,2240.32 1451.13,2244.35 cw(c1454.84,2240.64) 1458.56,2244.35 cw(c1454.84,2240.64) 1458.56,2236.92 1450.82,2229.18 1438.57,2216.94 ccw(c1442.29,2213.23) 1438.57,2209.52 ccw(c1442.29,2213.23) 1446,2209.52 1458.24,2221.76 1465.98,2229.5 cw(c1469.69,2225.79) 1473.4,2229.5 cw(c1469.69,2225.79) 1473.4,2222.08 1465.66,2214.34 1453.42,2202.1 ccw(c1457.14,2198.38) 1453.42,2194.67 ccw(c1457.14,2198.38) 1460.85,2194.67 1473.09,2206.91 1480.83,2214.65 cw(c1484.54,2210.94) 1488.25,2214.65 cw(c1484.54,2210.94) 1488.25,2207.23 1480.51,2199.49 1468.27,2187.25 ccw(c1471.99,2183.53) 1468.27,2179.82 ccw(c1471.99,2183.53) 1475.7,2179.82 1487.94,2192.06 1495.68,2199.8 cw(c1499.39,2196.09) 1503.1,2199.8 cw(c1499.39,2196.09) 1503.1,2192.38 1499.08,2188.35 ccw(c1502.79,2184.64) 1499.08,2180.92 1502.79,2177.21 1506.5,2173.5 1507,2173 1507,1655 1357,1505 v1(1357,1481)
ADDR3-D4: U1.D3 U6.H8 | length 1998.6
  Top Layer w3.5: U6.H8@1011.75,1889.51 v1(1027.5,1905.26) ; U1.D3@1175.05,1448.85 v1(1190.8,1464.6)
  Bottom Layer w3.5: v1(1027.5,1905.26) 996,1936.76 996,1968.2 981,1983.2 981,2172 1110,2301 1441,2301 1534,2208 1534,1629.15 1406.5,1501.65 1406.5,1486.55 1355.55,1435.6 1270.4,1435.6 1257,1449 1216,1449 1200.4,1464.6 v1(1190.8,1464.6)
ADDR3-D5: U1.D1 U6.F2 | length 1998.1
  Top Layer w3.5: U6.F2@1074.74,2078.49 v1(1090.49,2094.24) ; U1.D1@1175.35,1512.85 1175.35,1520.35 1225.5,1570.5 1291.5,1570.5 1345,1624 v1(1345,1690)
  Bottom Layer w3.5: v1(1090.49,2094.24) 1090.49,2144 1098.25,2151.75 1101.96,2155.47 1105.67,2159.18 cw(c1109.38,2155.47) 1113.09,2159.18 1118.97,2153.3 ccw(c1122.68,2157.02) 1126.39,2153.3 ccw(c1122.68,2157.02) 1126.39,2160.73 1120.52,2166.6 cw(c1124.23,2170.32) 1120.52,2174.03 cw(c1124.23,2170.32) 1127.94,2174.03 1138.93,2163.04 ccw(c1142.64,2166.76) 1146.35,2163.04 ccw(c1142.64,2166.76) 1146.35,2170.47 1135.37,2181.45 cw(c1139.08,2185.17) 1135.37,2188.88 1139,2192.51 1144.25,2192.51 1149.5,2192.51 cw(c1149.5,2187.26) 1154.75,2187.26 1154.75,2168.96 ccw(c1160,2168.96) 1160,2163.71 ccw(c1160,2168.96) 1165.25,2168.96 1165.25,2187.26 cw(c1170.5,2187.26) 1170.5,2192.51 cw(c1170.5,2187.26) 1175.75,2187.26 1175.75,2166.76 ccw(c1181,2166.76) 1181,2161.51 ccw(c1181,2166.76) 1186.25,2166.76 1186.25,2187.26 cw(c1191.5,2187.26) 1191.5,2192.51 cw(c1191.5,2187.26) 1196.75,2187.26 1196.75,2166.76 ccw(c1202,2166.76) 1202,2161.51 ccw(c1202,2166.76) 1207.25,2166.76 1207.25,2187.26 cw(c1212.5,2187.26) 1212.5,2192.51 cw(c1212.5,2187.26) 1217.75,2187.26 1217.75,2166.76 ccw(c1223,2166.76) 1223,2161.51 ccw(c1223,2166.76) 1228.25,2166.76 1228.25,2187.26 cw(c1233.5,2187.26) 1233.5,2192.51 cw(c1233.5,2187.26) 1238.75,2187.26 1238.75,2166.76 ccw(c1244,2166.76) 1244,2161.51 ccw(c1244,2166.76) 1249.25,2166.76 1249.25,2187.26 cw(c1254.5,2187.26) 1254.5,2192.51 cw(c1254.5,2187.26) 1259.75,2187.26 1259.75,2166.76 ccw(c1265,2166.76) 1265,2161.51 ccw(c1265,2166.76) 1270.25,2166.76 1270.25,2187.26 cw(c1275.5,2187.26) 1275.5,2192.51 cw(c1275.5,2187.26) 1280.75,2187.26 1280.75,2163.32 ccw(c1286,2163.32) 1286,2158.07 ccw(c1286,2163.32) 1291.25,2163.32 1291.25,2187.26 cw(c1296.5,2187.26) 1296.5,2192.51 cw(c1296.5,2187.26) 1301.75,2187.26 1301.75,2144.25 ccw(c1307,2144.25) 1307,2139 ccw(c1307,2144.25) 1312.25,2144.25 1312.25,2187.26 cw(c1317.5,2187.26) 1317.5,2192.51 1322.75,2192.51 1327.49,2192.51 1331.2,2188.8 1338.63,2181.37 1342.34,2177.66 cw(c1338.63,2173.95) 1342.34,2170.24 1320.79,2148.68 ccw(c1324.5,2144.97) 1320.79,2141.26 ccw(c1324.5,2144.97) 1328.21,2141.26 1349.76,2162.81 cw(c1353.48,2159.1) 1357.19,2162.81 1360.9,2159.1 1364.5,2155.5 1428,2092 1428,1943 1428,1856.49 cw(c1422.75,1856.49) 1422.75,1851.24 1416.95,1851.24 ccw(c1416.95,1845.99) 1411.7,1845.99 ccw(c1416.95,1845.99) 1416.95,1840.74 1428,1840.74 1443.05,1840.74 cw(c1443.05,1835.49) 1448.3,1835.49 cw(c1443.05,1835.49) 1443.05,1830.24 1428,1830.24 1416.95,1830.24 ccw(c1416.95,1824.99) 1411.7,1824.99 ccw(c1416.95,1824.99) 1416.95,1819.74 1428,1819.74 1443.05,1819.74 cw(c1443.05,1814.49) 1448.3,1814.49 cw(c1443.05,1814.49) 1443.05,1809.24 1428,1809.24 1416.95,1809.24 ccw(c1416.95,1803.99) 1411.7,1803.99 ccw(c1416.95,1803.99) 1416.95,1798.74 1428,1798.74 1443.05,1798.74 cw(c1443.05,1793.49) 1448.3,1793.49 cw(c1443.05,1793.49) 1443.05,1788.24 1433.25,1788.24 ccw(c1433.25,1782.99) 1428,1782.99 1428,1777.74 1428,1772.49 1426.75,1771.25 1383.51,1728 1383,1728 v1(1345,1690)
ADDR3-D6: U1.C1 U6.G2 | length 1998.5
  Top Layer w3.5: U6.G2@1043.24,2078.49 v1(1058.99,2094.24) ; U1.C1@1206.85,1512.85 1206.85,1531.85 1231,1556 1312,1556 1361,1605 1361,1675 v1(1386,1700)
  Bottom Layer w3.5: v1(1058.99,2094.24) 1079,2114.24 1079,2119.49 1079,2129.99 ccw(c1079,2134.49) 1083.49,2134.49 1083.49,2136 ccw(c1079,2136) 1079,2140.49 cw(c1079,2144.5) 1075,2144.5 1075,2146.99 cw(c1079,2146.99) 1079,2150.99 1085.41,2150.99 ccw(c1085.41,2156.24) 1090.66,2156.24 ccw(c1085.41,2156.24) 1085.41,2161.49 1080.51,2161.49 cw(c1080.51,2163) 1079,2163 1079,2170 1084.5,2175.5 1086.37,2177.37 ccw(c1084.53,2179.21) 1086.37,2181.05 cw(c1090.09,2184.76) 1086.37,2188.48 cw(c1090.09,2184.76) 1093.8,2188.48 1095.64,2186.64 1105.72,2176.55 ccw(c1109.43,2180.27) 1113.15,2176.55 ccw(c1109.43,2180.27) 1113.15,2183.98 1103.06,2194.06 1101.22,2195.9 cw(c1104.93,2199.61) 1101.22,2203.33 cw(c1104.93,2199.61) 1108.65,2203.33 1110.49,2201.49 1120.57,2191.4 ccw(c1124.28,2195.11) 1127.99,2191.4 ccw(c1124.28,2195.11) 1127.99,2198.83 1121.5,2205.32 cw(c1125.09,2208.91) 1121.5,2212.5 1127,2218 1153,2218 1153.25,2218 1153.25,2204.76 ccw(c1158.5,2204.76) 1158.5,2199.51 ccw(c1158.5,2204.76) 1163.75,2204.76 1163.75,2212.75 cw(c1169,2212.75) 1169,2218 cw(c1169,2212.75) 1174.25,2212.75 1174.25,2204.76 ccw(c1179.5,2204.76) 1179.5,2199.51 ccw(c1179.5,2204.76) 1184.75,2204.76 1184.75,2212.75 cw(c1190,2212.75) 1190,2218 cw(c1190,2212.75) 1195.25,2212.75 1195.25,2204.76 ccw(c1200.5,2204.76) 1200.5,2199.51 ccw(c1200.5,2204.76) 1205.75,2204.76 1205.75,2212.75 cw(c1211,2212.75) 1211,2218 cw(c1211,2212.75) 1216.25,2212.75 1216.25,2204.76 ccw(c1221.5,2204.76) 1221.5,2199.51 ccw(c1221.5,2204.76) 1226.75,2204.76 1226.75,2212.75 cw(c1232,2212.75) 1232,2218 cw(c1232,2212.75) 1237.25,2212.75 1237.25,2204.76 ccw(c1242.5,2204.76) 1242.5,2199.51 ccw(c1242.5,2204.76) 1247.75,2204.76 1247.75,2218 cw(c1251.89,2218) 1251.89,2222.14 1254.11,2222.14 cw(c1254.11,2218) 1258.25,2218 1258.25,2204.76 ccw(c1263.5,2204.76) 1263.5,2199.51 ccw(c1263.5,2204.76) 1268.75,2204.76 1268.75,2212.75 cw(c1274,2212.75) 1274,2218 cw(c1274,2212.75) 1279.25,2212.75 1279.25,2204.76 ccw(c1284.5,2204.76) 1284.5,2199.51 ccw(c1284.5,2204.76) 1289.75,2204.76 1289.75,2212.75 cw(c1295,2212.75) 1295,2218 cw(c1295,2212.75) 1300.25,2212.75 1300.25,2204.76 ccw(c1305.5,2204.76) 1305.5,2199.51 ccw(c1305.5,2204.76) 1310.75,2204.76 1310.75,2212.75 cw(c1316,2212.75) 1316,2218 1329,2218 1337,2210 1339.71,2207.29 cw(c1335.99,2203.58) 1339.71,2199.87 1338.58,2198.74 ccw(c1342.29,2195.03) 1338.58,2191.32 ccw(c1342.29,2195.03) 1346,2191.32 1350.84,2196.16 1360.18,2205.5 cw(c1363.89,2201.78) 1367.61,2205.5 cw(c1363.89,2201.78) 1367.61,2198.07 1358.27,2188.73 1353.43,2183.89 ccw(c1357.14,2180.18) 1353.43,2176.47 ccw(c1357.14,2180.18) 1360.85,2176.47 1365.69,2181.31 1375.03,2190.65 cw(c1378.74,2186.93) 1382.46,2190.65 cw(c1378.74,2186.93) 1382.46,2183.22 1373.12,2173.88 1368.28,2169.04 ccw(c1371.99,2165.33) 1368.28,2161.62 ccw(c1371.99,2165.33) 1375.7,2161.62 1380.54,2166.46 1389.88,2175.8 cw(c1393.59,2172.09) 1397.31,2175.8 cw(c1393.59,2172.09) 1397.31,2168.37 1387.97,2159.03 1383.13,2154.19 ccw(c1386.84,2150.48) 1383.13,2146.77 ccw(c1386.84,2150.48) 1390.55,2146.77 1395.39,2151.61 1404.73,2160.95 cw(c1408.44,2157.24) 1412.15,2160.95 cw(c1408.44,2157.24) 1412.15,2153.52 1402.82,2144.18 1397.98,2139.35 ccw(c1401.69,2135.63) 1397.98,2131.92 ccw(c1401.69,2135.63) 1405.4,2131.92 1410.24,2136.76 1419.58,2146.1 cw(c1423.29,2142.39) 1427,2146.1 cw(c1423.29,2142.39) 1427,2138.67 1417.66,2129.34 1412.83,2124.5 ccw(c1416.54,2120.78) 1412.83,2117.07 ccw(c1416.54,2120.78) 1420.25,2117.07 1425.09,2121.91 1434.43,2131.25 cw(c1438.14,2127.54) 1441.85,2131.25 cw(c1438.14,2127.54) 1441.85,2123.83 1432.51,2114.49 1427.67,2109.65 ccw(c1431.39,2105.93) 1427.67,2102.22 ccw(c1431.39,2105.93) 1435.1,2102.22 1439.94,2107.06 1449.28,2116.4 cw(c1452.99,2112.69) 1456.7,2116.4 cw(c1452.99,2112.69) 1456.7,2108.98 1451.08,2103.35 ccw(c1454.79,2099.64) 1451.08,2095.92 1454.79,2092.21 1458.5,2088.5 1459,2088 1459,1773 v1(1386,1700)
ADDR3-D7: U1.E1 U6.E3 | length 1997.7
  Top Layer w3.5: U6.E3@1106.24,2046.99 v1(1121.99,2062.74) ; U1.E1@1143.85,1512.85 1143.85,1547.85 1214.1,1618.1 1233.9,1618.1 1258.8,1643 1271,1643 v1(1350,1722)
  Bottom Layer w3.5: v1(1121.99,2062.74) 1121.99,2139 1137.49,2154.51 1277.49,2154.51 1319.5,2112.5 ccw(c1323.21,2116.21) 1326.92,2112.5 1353.98,2139.56 cw(c1357.69,2135.84) 1361.41,2139.56 cw(c1357.69,2135.84) 1361.41,2132.13 1330.64,2101.36 1307.37,2078.09 ccw(c1311.08,2074.38) 1307.37,2070.67 ccw(c1311.08,2074.38) 1314.79,2070.67 1338.06,2093.94 1368.83,2124.71 cw(c1372.54,2121) 1376.26,2124.71 cw(c1372.54,2121) 1376.26,2117.28 1345.49,2086.51 1322.22,2063.24 ccw(c1325.93,2059.53) 1322.22,2055.82 ccw(c1325.93,2059.53) 1329.64,2055.82 1352.91,2079.09 1383.68,2109.86 cw(c1387.39,2106.15) 1391.1,2109.86 cw(c1387.39,2106.15) 1391.1,2102.43 1360.34,2071.66 1334.11,2045.44 ccw(c1337.82,2041.72) 1334.11,2038.01 ccw(c1337.82,2041.72) 1341.53,2038.01 1364.05,2060.53 cw(c1367.76,2056.82) 1371.47,2060.53 1375.18,2056.82 1380,2052 1380,2046.75 1380,2041.5 ccw(c1385.25,2041.5) 1385.25,2036.25 1409.29,2036.25 cw(c1409.29,2031) 1414.54,2031 cw(c1409.29,2031) 1409.29,2025.75 1380,2025.75 1345.08,2025.75 ccw(c1345.08,2020.5) 1339.83,2020.5 ccw(c1345.08,2020.5) 1345.08,2015.25 1380,2015.25 1409.29,2015.25 cw(c1409.29,2010) 1414.54,2010 cw(c1409.29,2010) 1409.29,2004.75 1380,2004.75 1339.71,2004.75 ccw(c1339.71,1999.5) 1334.46,1999.5 ccw(c1339.71,1999.5) 1339.71,1994.25 1380,1994.25 1409.29,1994.25 cw(c1409.29,1989) 1414.54,1989 cw(c1409.29,1989) 1409.29,1983.75 1380,1983.75 1339.71,1983.75 ccw(c1339.71,1978.5) 1334.46,1978.5 ccw(c1339.71,1978.5) 1339.71,1973.25 1374.75,1973.25 cw(c1374.75,1968) 1380,1968 1380,1965 1380,1752 v1(1350,1722)
ADDR3-D8: U1.E2 U6.C2 | length 1044.9
  Top Layer w3.5: U1.E2@1143.85,1481.35 1160,1497.5 1160,1534 1209,1583 1257,1583 1275,1601 v1(1275,1604) ; U6.C2@1169,2078 1184.75,2093.75 1263,2093.75 1282,2093.75 1317,2093.75 1402.25,2093.75 1468,2028 1468,1864 1273,1669 v1(1272,1669)
  Bottom Layer w3.5: v1(1272,1669) 1273.5,1667.5 1273.5,1605.5 v1(1275,1604)
ADDR3-D9: U1.E3 U6.A2 | length 1044.2
  Top Layer w3.5: v1(1120,1651) 1120,1671 1168,1719 1302,1719 1446,1863 1446,2023 1390.51,2078.49 U6.A2@1232.22,2078.49 ; v1(1128.1,1465.6) U1.E3@1143.85,1449.85
  Bottom Layer w3.5: v1(1120,1651) 1124,1647 1124,1617 1138.75,1602.25 1138.75,1472.75 1131.6,1465.6 v1(1128.1,1465.6)
ADDR3-D10: U1.G3 U6.C3 | length 1132.6
  Top Layer w3.5: v1(1065.1,1434.1) U1.G3@1080.85,1449.85 ; v1(1105,1668) 1105,1673 1165,1733 1293,1733 1422,1862 1422,2017 1376.25,2062.75 1184.75,2062.75 U6.C3@1169,2047
  Bottom Layer w3.5: v1(1065.1,1434.1) 1070.1,1434.1 1085,1449 1101.35,1449 1111.45,1459.1 1111.45,1489.55 1095,1506 1095,1568 1104,1577 1104,1667 v1(1105,1668)
ADDR3-D11: U1.H3 U6.A3 | length 1042.3
  Top Layer w3.5: U1.H3@1049.35,1449.85 v1(1065.1,1465.6) ; v1@1079,1627 1079,1665 1154,1740 1280,1740 1401,1861 1401,1999 1353.01,2046.99 1293,2046.99 1288.26,2046.99 cw(c1288.26,2050.5) 1284.75,2050.5 ; U6.A3@1232.22,2046.99 1248,2046.99 1249.74,2046.99 ccw(c1249.74,2050.5) 1253.25,2050.5 cw(c1258.5,2050.5) 1258.5,2055.75 cw(c1258.5,2050.5) 1263.75,2050.5 1263.75,2046.99 1263.75,2018.69 ccw(c1269,2018.69) 1269,2013.44 ccw(c1269,2018.69) 1274.25,2018.69 1274.25,2046.99 1274.25,2049.06 cw(c1279.5,2049.06) 1279.5,2054.31 cw(c1279.5,2049.06) 1284.75,2049.06 ; 1284.75,2049.56 1284.75,2050
  Bottom Layer w3.5: v1(1065.1,1465.6) 1065.1,1571.1 1080,1586 v1(1080,1627)
ADDR3-D12: U1.J3 U6.A7 | length 1042.9
  Top Layer w3.5: U1.J3@1017.85,1449.85 v1(1033.6,1465.6) ; v1(1042,1549) 1039,1552 1039,1648 1055,1664 ; 1056,1665 1055,1664 ; U6.A7@1232.22,1921.01 1232.22,1947 1232.22,1952.25 1232.22,1955.22 1253,1976 1258.25,1976 1263.5,1976 cw(c1263.5,1970.75) 1268.75,1970.75 1268.75,1946.42 ccw(c1274,1946.42) 1274,1941.17 ccw(c1274,1946.42) 1279.25,1946.42 1279.25,1976 1279.25,1987.2 cw(c1284.5,1987.2) 1284.5,1992.45 cw(c1284.5,1987.2) 1289.75,1987.2 1289.75,1976 1289.75,1961.8 ccw(c1295,1961.8) 1295,1956.55 ccw(c1295,1961.8) 1300.25,1961.8 1300.25,1976 1300.25,1987.2 cw(c1305.5,1987.2) 1305.5,1992.45 cw(c1305.5,1987.2) 1310.75,1987.2 1310.75,1981.25 ccw(c1316,1981.25) 1316,1976 1322,1976 1355,1943 1355,1857 1252,1754 1144.9,1754 1055,1664.1 1055,1664
  Bottom Layer w3.5: v1(1033.6,1465.6) 1055,1487 1055,1532 1040,1547 v1(1042,1549)
ADDR3-D13: U1.H2 U6.D7 | length 1100
  Top Layer w3.5: 1048,1647 1047,1646 1047,1566.25 1056.25,1557 1056.25,1541.83 1065,1533.08 1065,1492 1054.35,1481.35 U1.H2@1049.35,1481.35 ; 1048.5,1647.5 1062,1661 1062,1661.1 1147.9,1747 1267,1747 1376,1856 1376,1973 1344,2005 1288,2005 1257,2005 cw(c1257,2010.25) 1251.75,2010.25 1251.75,2016.32 ccw(c1246.5,2016.32) 1246.5,2021.57 ccw(c1246.5,2016.32) 1241.25,2016.32 1241.25,2005 1241.25,1994.74 cw(c1236,1994.74) 1236,1989.49 cw(c1236,1994.74) 1230.75,1994.74 1230.75,2005 1230.75,2011.47 ccw(c1225.5,2011.47) 1225.5,2016.72 ccw(c1225.5,2011.47) 1220.25,2011.47 1220.25,2010.25 cw(c1215,2010.25) 1215,2005 1170,2005 1162.53,1997.53 1137.73,1972.73 1137.73,1934 U6.D7@1137.73,1921.01
ADDR3-D14: U1.H1 U6.C8 | length 1101.7
  Top Layer w3.5: U1.H1@1049.35,1512.85 1049.35,1517.65 1027,1540 1027,1646 1050,1669 ; 1049.85,1669.15 1141.7,1761 1151,1761 ccw(c1151,1766.25) 1156.25,1766.25 1156.25,1766.43 cw(c1161.5,1766.43) 1161.5,1771.68 cw(c1161.5,1766.43) 1166.75,1766.43 1166.75,1766.25 ccw(c1172,1766.25) 1172,1761 ccw(c1172,1766.25) 1177.25,1766.25 1177.25,1783 cw(c1182.5,1783) 1182.5,1788.25 cw(c1182.5,1783) 1187.75,1783 1187.75,1766.25 ccw(c1193,1766.25) 1193,1761 ccw(c1193,1766.25) 1198.25,1766.25 1198.25,1783 cw(c1203.5,1783) 1203.5,1788.25 cw(c1203.5,1783) 1208.75,1783 1208.75,1766.25 ccw(c1214,1766.25) 1214,1761 ccw(c1214,1766.25) 1219.25,1766.25 1219.25,1783 cw(c1224.5,1783) 1224.5,1788.25 cw(c1224.5,1783) 1229.75,1783 1229.75,1762.25 ccw(c1231,1762.25) 1231,1761 1239,1761 1242,1764 1242.87,1764.87 ccw(c1240.03,1767.71) 1242.87,1770.55 cw(c1246.59,1774.26) 1242.87,1777.98 cw(c1246.59,1774.26) 1250.3,1777.98 1253.14,1775.14 1254.48,1773.8 ccw(c1258.19,1777.51) 1261.9,1773.8 ccw(c1258.19,1777.51) 1261.9,1781.22 1260.56,1782.56 1257.72,1785.4 cw(c1261.44,1789.11) 1257.72,1792.82 cw(c1261.44,1789.11) 1265.15,1792.82 1267.99,1789.99 1269.32,1788.65 ccw(c1273.04,1792.36) 1276.75,1788.65 ccw(c1273.04,1792.36) 1276.75,1796.07 1275.41,1797.41 1272.57,1800.25 cw(c1276.28,1803.96) 1272.57,1807.67 cw(c1276.28,1803.96) 1280,1807.67 1282.84,1804.84 1284.17,1803.5 ccw(c1287.89,1807.21) 1291.6,1803.5 ccw(c1287.89,1807.21) 1291.6,1810.92 1290.26,1812.26 1287.42,1815.1 cw(c1291.13,1818.81) 1287.42,1822.52 cw(c1291.13,1818.81) 1294.85,1822.52 1297.68,1819.68 1299.02,1818.35 ccw(c1302.74,1822.06) 1306.45,1818.35 ccw(c1302.74,1822.06) 1306.45,1825.77 1305.11,1827.11 1302.27,1829.95 cw(c1305.98,1833.66) 1302.27,1837.37 cw(c1305.98,1833.66) 1309.7,1837.37 1312.53,1834.53 1313.87,1833.2 ccw(c1317.59,1836.91) 1321.3,1833.2 ccw(c1317.59,1836.91) 1321.3,1840.62 1319.96,1841.96 1317.12,1844.8 cw(c1320.83,1848.51) 1317.12,1852.22 cw(c1320.83,1848.51) 1324.54,1852.22 1327.38,1849.38 1328.72,1848.04 ccw(c1332.43,1851.76) 1336.15,1848.04 ccw(c1332.43,1851.76) 1336.15,1855.47 cw(c1337.49,1856.81) 1336.15,1858.15 1340,1862 1340,1867.25 1340,1876 1340,1926 1340,1927 1339.42,1927.58 1339.42,1928.53 1323.95,1944 1294.46,1944 1254.46,1904 1236.5,1904 1233,1904 1186,1904 1171.51,1889.51 U6.C8@1169.23,1889.51
ADDR3-D15: U1.J1 U6.B8 | length 1089.3
  Top Layer w3.5: U1.J1@1017.85,1512.85 1017.85,1513.3 1008,1523.15 1008,1638 1145,1775 ccw(c1141.29,1778.71) 1145,1782.42 1112.28,1815.15 cw(c1115.99,1818.86) 1112.28,1822.57 cw(c1115.99,1818.86) 1119.7,1822.57 1156.14,1786.14 1161.36,1780.91 ccw(c1165.08,1784.62) 1168.79,1780.91 ccw(c1165.08,1784.62) 1168.79,1788.33 1167.27,1789.85 cw(c1170.99,1793.56) 1167.27,1797.27 1170.99,1800.99 1173,1803 1178.25,1803 1183.5,1803 ccw(c1183.5,1808.25) 1188.75,1808.25 1188.75,1840.92 cw(c1194,1840.92) 1194,1846.17 cw(c1194,1840.92) 1199.25,1840.92 1199.25,1803 1199.25,1800.47 ccw(c1204.5,1800.47) 1204.5,1795.22 ccw(c1204.5,1800.47) 1209.75,1800.47 1209.75,1803 1209.75,1826.6 cw(c1215,1826.6) 1215,1831.85 cw(c1215,1826.6) 1220.25,1826.6 1220.25,1803 1220.25,1800.47 ccw(c1225.5,1800.47) 1225.5,1795.22 ccw(c1225.5,1800.47) 1230.75,1800.47 1230.75,1803 1230.75,1816.61 cw(c1236,1816.61) 1236,1821.86 cw(c1236,1816.61) 1241.25,1816.61 1241.25,1808.25 ccw(c1246.5,1808.25) 1246.5,1803 1251.75,1803 1258,1803 1261.71,1806.71 1269.14,1814.14 1272.85,1817.85 ccw(c1269.14,1821.56) 1272.85,1825.27 1246.66,1851.46 cw(c1250.37,1855.17) 1246.66,1858.89 cw(c1250.37,1855.17) 1254.08,1858.89 1281.47,1831.5 ccw(c1283.98,1834.02) 1286.5,1831.5 1315.05,1860.05 1320,1865 1320,1879.47 1303.47,1896 1291,1896 1269,1874 1216.24,1874 U6.B8@1200.72,1889.51
ADDR3-DM0: U1.A1 U6.E7 | length 1999.6
  Top Layer w3.5: U6.E7@1106.24,1921.01 v1(1106.24,1944.76) ; U1.A1@1269.85,1512.85 v1(1269.85,1535.15)
  Bottom Layer w3.5: v1(1106.24,1944.76) 1108,1943 1111.71,1939.29 1115.42,1935.58 cw(c1111.71,1931.86) 1115.42,1928.15 1109.93,1922.65 ccw(c1113.64,1918.94) 1109.93,1915.23 ccw(c1113.64,1918.94) 1117.35,1915.23 1126.56,1924.44 1147.06,1944.94 cw(c1150.78,1941.23) 1154.49,1944.94 cw(c1150.78,1941.23) 1154.49,1937.52 1137.7,1920.73 ccw(c1141.41,1917.01) 1137.7,1913.3 1141,1910 1141,1904.75 1141,1899.5 ccw(c1146.25,1899.5) 1146.25,1894.25 1193.36,1894.25 cw(c1193.36,1889) 1198.61,1889 cw(c1193.36,1889) 1193.36,1883.75 1146.25,1883.75 ccw(c1146.25,1878.5) 1141,1878.5 1141,1873.25 1141,1868 1161,1848 1161,1842.75 1161,1837.5 cw(c1155.75,1837.5) 1155.75,1832.25 ccw(c1155.75,1827) 1150.5,1827 ccw(c1155.75,1827) 1155.75,1821.75 1161,1821.75 1228.18,1821.75 cw(c1228.18,1816.5) 1233.43,1816.5 cw(c1228.18,1816.5) 1228.18,1811.25 1161,1811.25 1135.21,1811.25 ccw(c1135.21,1806) 1129.96,1806 ccw(c1135.21,1806) 1135.21,1800.75 1161,1800.75 1240.05,1800.75 cw(c1240.05,1795.5) 1245.3,1795.5 cw(c1240.05,1795.5) 1240.05,1790.25 1166.25,1790.25 ccw(c1166.25,1785) 1161,1785 1161,1782 1164.71,1778.29 1168.42,1774.58 ccw(c1172.14,1778.29) 1175.85,1774.58 1182.36,1781.08 cw(c1186.07,1777.37) 1189.78,1781.08 cw(c1186.07,1777.37) 1189.78,1773.66 1183.27,1767.15 ccw(c1186.99,1763.44) 1183.27,1759.73 1186.99,1756.01 1187.25,1755.75 1187.25,1750.5 1187.25,1742 cw(c1185.25,1742) 1185.25,1740 ccw(c1185.25,1734.75) 1180,1734.75 ccw(c1185.25,1734.75) 1185.25,1729.5 1187.25,1729.5 1204.73,1729.5 cw(c1204.73,1724.25) 1209.98,1724.25 cw(c1204.73,1724.25) 1204.73,1719 1187.25,1719 1186.14,1719 ccw(c1186.14,1713.75) 1180.89,1713.75 ccw(c1186.14,1713.75) 1186.14,1708.5 1187.25,1708.5 1190.04,1708.5 cw(c1190.04,1703.25) 1195.29,1703.25 cw(c1190.04,1703.25) 1190.04,1698 ; 1190.1,1698 1190.87,1698 ; 1190.93,1698 ccw(c1190.93,1694.32) 1187.25,1694.32 1187.25,1687.5 1187.25,1677 1187.25,1673.25 1176,1662 1176,1656.75 1176,1646.25 1176,1635.75 1176,1629 1179.71,1625.29 1183.42,1621.58 ccw(c1187.14,1625.29) 1190.85,1621.58 1197.38,1628.1 cw(c1201.09,1624.39) 1204.8,1628.1 cw(c1201.09,1624.39) 1204.8,1620.68 1194.56,1610.44 1177.17,1593.04 ccw(c1180.88,1589.33) 1177.17,1585.62 ccw(c1180.88,1589.33) 1184.59,1585.62 1201.99,1603.01 1255.67,1656.7 cw(c1259.39,1652.99) 1263.1,1656.7 cw(c1259.39,1652.99) 1263.1,1649.28 1209.41,1595.59 1177.17,1563.34 ccw(c1180.88,1559.63) 1177.17,1555.92 ccw(c1180.88,1559.63) 1184.59,1555.92 1216.84,1588.16 1256.91,1628.24 cw(c1260.62,1624.53) 1264.33,1628.24 cw(c1260.62,1624.53) 1264.33,1620.81 1224.26,1580.74 1177.17,1533.65 ccw(c1180.88,1529.93) 1177.17,1526.22 ccw(c1180.88,1529.93) 1184.59,1526.22 1231.68,1573.32 1254.51,1596.15 cw(c1258.23,1592.43) 1261.94,1596.15 cw(c1258.23,1592.43) 1261.94,1588.72 1239.11,1565.89 1229.55,1556.34 ccw(c1233.27,1552.62) 1229.55,1548.91 ccw(c1233.27,1552.62) 1236.98,1548.91 1246.53,1558.47 1276.57,1588.5 cw(c1280.28,1584.79) 1283.99,1588.5 cw(c1280.28,1584.79) 1283.99,1581.08 1256,1553.08 ccw(c1258.04,1551.04) 1256,1549 v1(1269.85,1535.15)